# Altium PCB main.PcbDoc (part 2 of 8)
Units mil, origin at the board's own origin, x right, y up, seen from the top; angles counter-clockwise.
Board outline 3385.83 x 2362.2 mil, 8 copper layers (L1 (SIG), L2 (GND), L3 (SIG), L4 (GND), L5 (PWR), L6 (SIG), L7 (GND), L8 (SIG)), stack 46.958 mil thick; 318 components, 288 nets, 1482 pads, 1056 vias.
Unrouted connection lines stored in the file: 7.
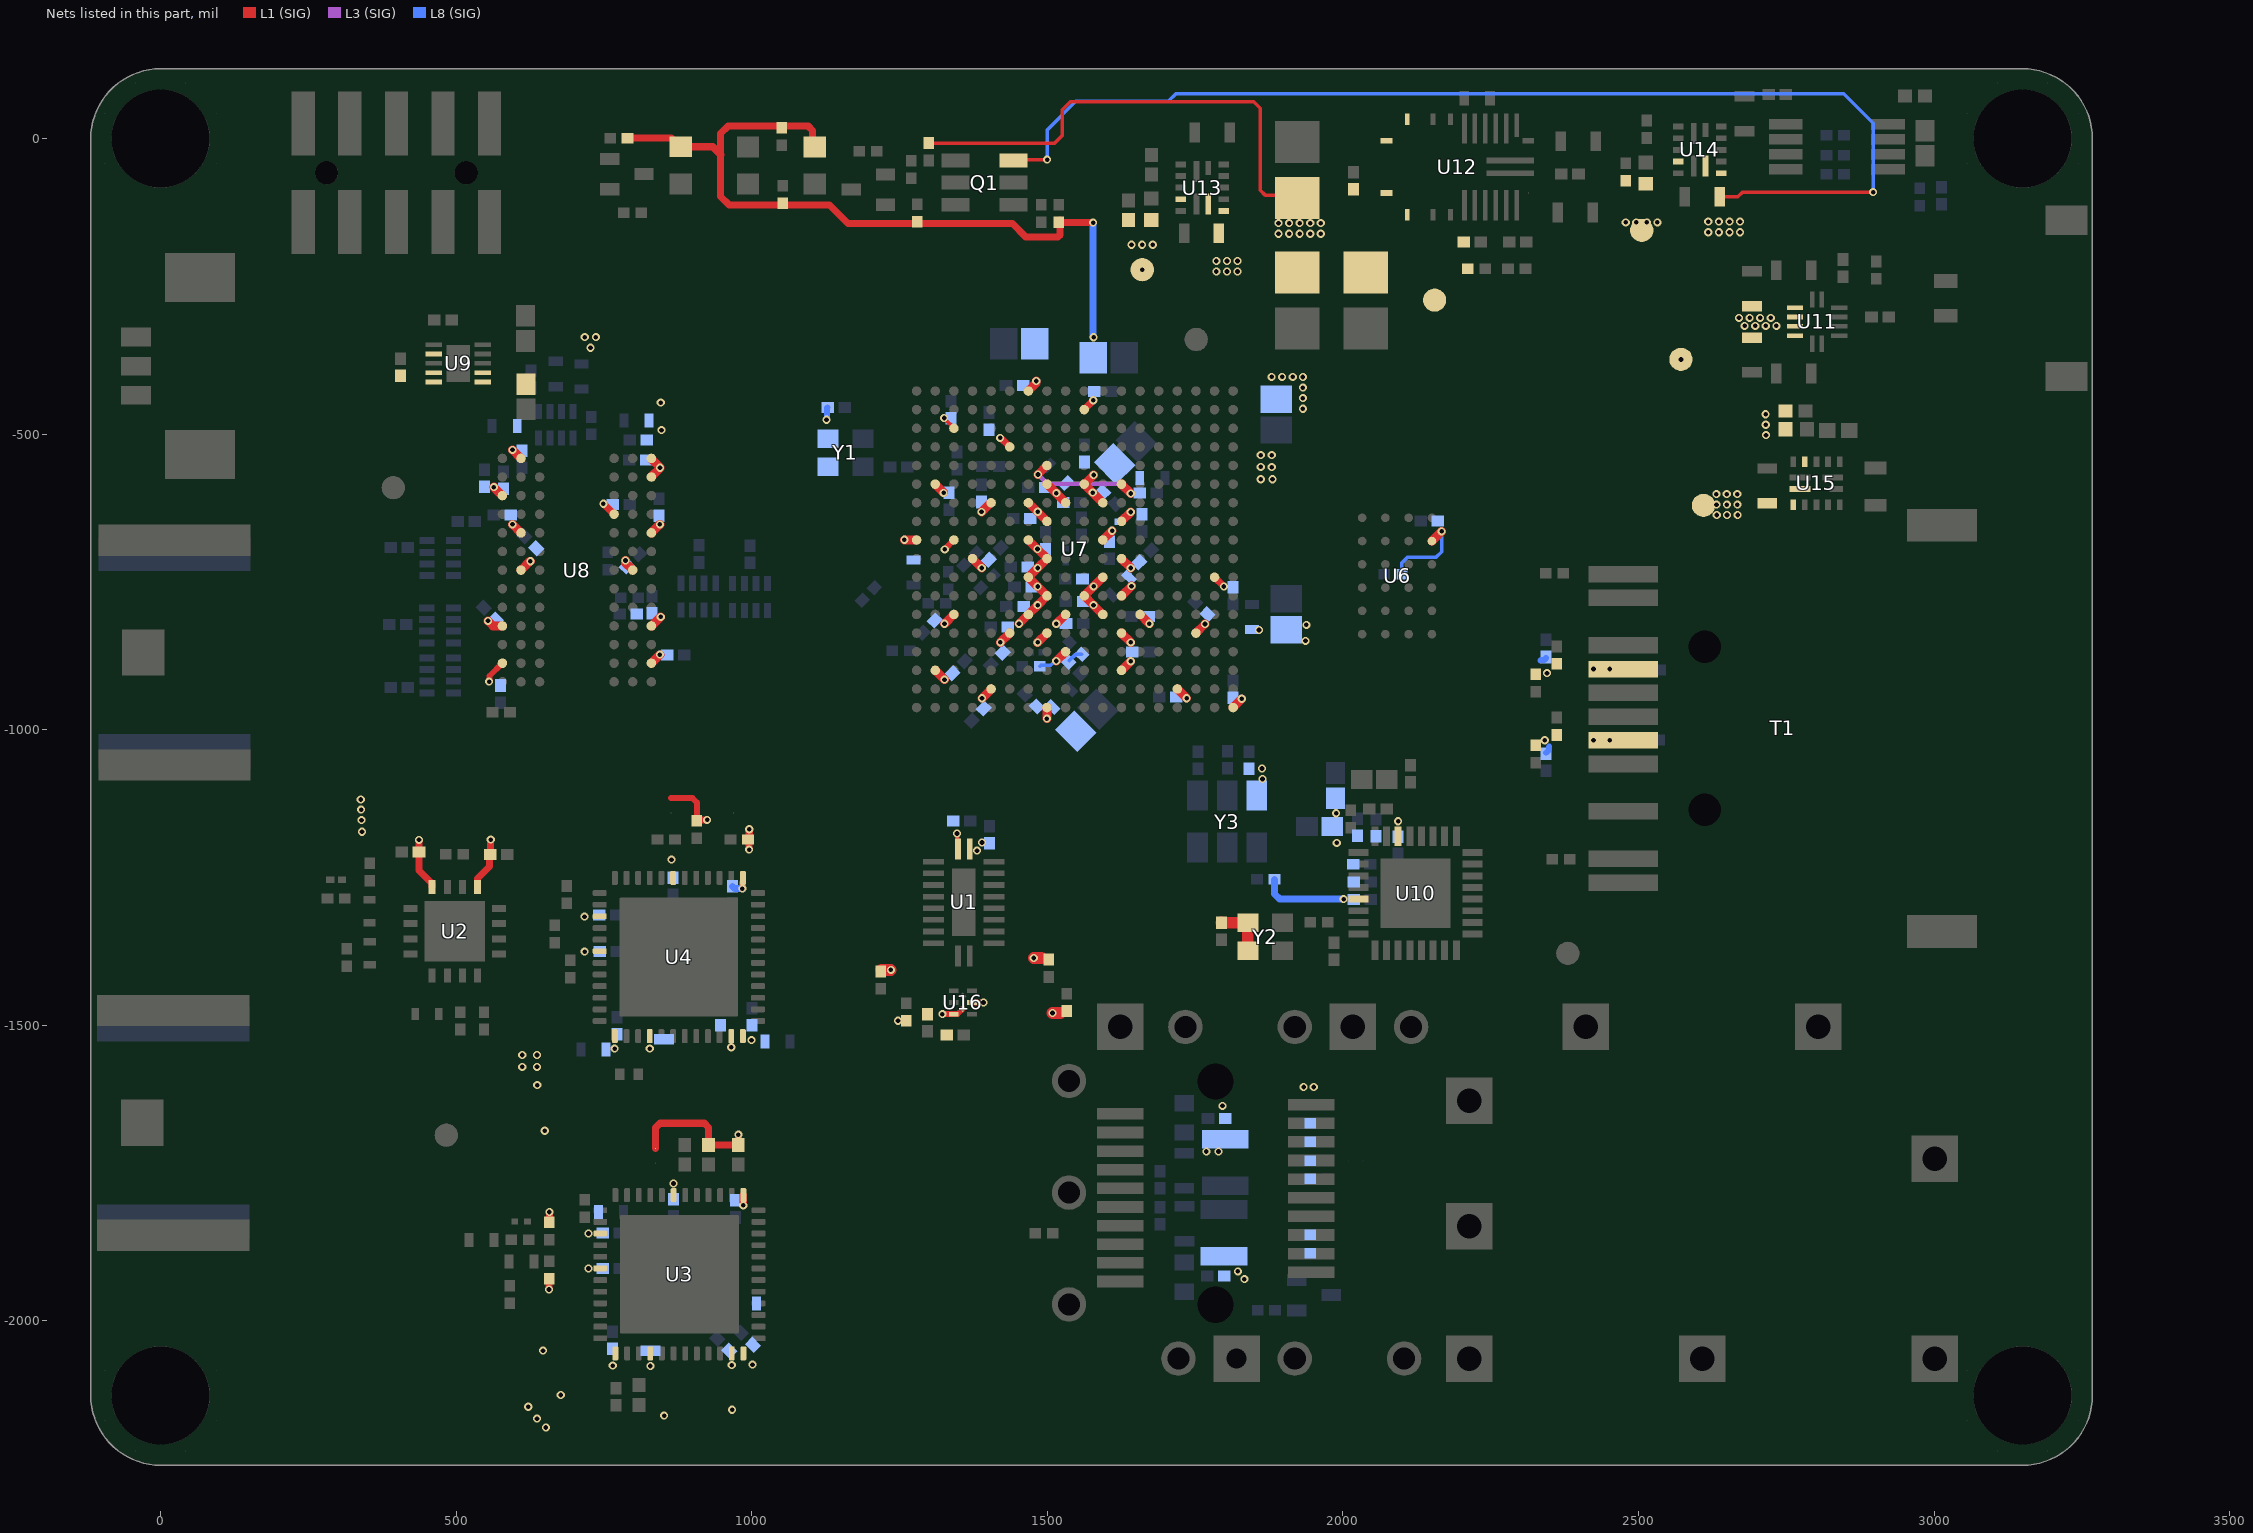
[diagram p8: the nets of this part, all layers, seen from the top]

## Footprints (in the part's own frame and the unit in brackets; to place one, negate y for a bottom-side part, rotate by r counter-clockwise, add the part's x,y. Pads: shape width x height; smd on the part's side, far side on the other; paste and mask are expansions set on the pad) (continued)
CAPC1005X55X10NL05 [mm] "Chip Capacitor, 2-Leads, Body 1.05x0.55mm, IPC Medium Density"
  rect 0.42x0.62 smd: 1(-0.55,0) 2(0.55,0)
  silkscreen extent -0.83,-0.48 0.83,0.48, body extent -0.53,-0.28 0.53,0.28, height 0.55
CAPC1608X100X20LL10 [mm] "Chip Capacitor, 2-Leads, Body 1.70x0.90mm, IPC High Density"
  rect 0.45x0.85 smd: 1(-0.75,0) 2(0.75,0)
  silkscreen extent -0.15,-0.33 0.15,0.33, body extent -0.85,-0.45 0.85,0.45, height 1
CAPC1608X100X20NL10 [mm] "Chip Capacitor, 2-Leads, Body 1.70x0.90mm, IPC Medium Density"
  rect 0.55x0.95 smd: 1(-0.8,0) 2(0.8,0)
  silkscreen extent -0.15,-0.38 0.15,0.38, body extent -0.85,-0.45 0.85,0.45, height 1
Fiducial [mm]
  round 1 smd paste+0 mask+0.5: 0(0,0)
  round 1 smd far side paste+0 mask+0.5: 0(0,0)
  L1 (SIG) pour cut-out: 0,-1 -0.383,-0.924 -0.707,-0.707 -0.924,-0.383 -1,0 -1,0 -0.924,0.383 -0.707,0.707 -0.383,0.924 0,1 0,1 0.383,0.924 0.707,0.707 0.924,0.383 1,0 1,0 0.924,-0.383 0.707,-0.707 0.383,-0.924 0,-1
  Keep-Out Layer circle w0.01: c0,0 r1
  Keep-Out Layer circle w0.01: c0,0 r1
FP-510CD-MFG [mm]
  rect 0.9x0.24 smd paste+0 mask+0: 1(-2.3,-0.25) 10(2.3,-0.25) 11(2.3,0.25) 20(-2.3,0.25)
  rect 0.24x0.9 smd paste+0 mask+0: 2(-1.75,-1.3) 3(-1.25,-1.3) 4(-0.75,-1.3) 5(-0.25,-1.3) 6(0.25,-1.3) 7(0.75,-1.3) 8(1.25,-1.3) 9(1.75,-1.3) 12(1.75,1.3) 13(1.25,1.3) 14(0.75,1.3) 15(0.25,1.3) 16(-0.25,1.3) 17(-0.75,1.3) 18(-1.25,1.3) 19(-1.75,1.3)
  rect 2.9x1 smd paste+0 mask+0: 21(0,0)
  silkscreen extent -3.45,-1.33 2.32,1.33, body extent -2.85,-1.85 2.85,1.85, height 0.25
FP-87832-1020-MFG [mm]
  rect 1x2.75 smd paste+0 mask+0: 1(-4,-2.125) 2(-4,2.125) 3(-2,-2.125) 4(-2,2.125) 5(0,-2.125) 6(0,2.125) 7(2,-2.125) 8(2,2.125) 9(4,-2.125) 10(4,2.125)
  round 1 hole 1 unplated paste-2539.97 mask+0: ""(-3,0) ""(3,0)
  silkscreen extent -6.43,-4.17 6.43,3.25, body extent -6.53,-3.6 6.53,3.6, height 0.25
FP-5040500291-MFG [mm]
  rect 0.6x1 smd paste+0 mask+0: 1(0.75,-3.04) 2(-0.75,-3.04)
  rect 1.25x1.8 smd paste-2539.97 mask+0: 3(-3.355,2.15) 4(3.355,2.15)
  silkscreen extent -3.47,-4.29 3.47,3.15, body extent -4.08,-3.64 4.08,3.25, height 0.25
FP-C1005-050-0_05-IPC_C [mil]
  rect 21.23x18.6 smd paste+0 mask+0: 1(-14.43,0) 2(14.43,0)
  silkscreen extent -25,-15 25,15, body extent -20,-10 20,10, height 22
FP-C1005-050-0_20-0_10-IPC_C [mil]
  rect 15.04x23.95 smd paste+0 mask+0: 1(-21.16,0) 2(21.16,0)
  silkscreen extent -29,-17 29,17, body extent -20,-10 20,10, height 22
FP-C1608-080-0_1-IPC_C [mil]
  rect 36.66x31.97 smd paste+0 mask+0: 1(-21.28,0) 2(21.28,0)
  silkscreen extent -40,-22 40,22, body extent -44,-22 44,22, height 10
FP-C2012-125-0_2-IPC_C [mil]
  rect 46.38x53.39 smd paste+0 mask+0: 1(-26.14,0) 2(26.14,0)
  silkscreen extent -49,-33 49,33, body extent -39,-25 39,25, height 57
FP-C3216-160-0_3-IPC_B [mil]
  rect 71.02x75.05 smd paste+0 mask+0: 1(-47.29,0) 2(47.29,0)
  silkscreen extent -83,-53 83,53, body extent -93,-47 93,47, height 10
FP-DFE252012C-MFG [mm]
  rect 0.8x2 smd paste+0 mask+0: 1(-1,0) 2(1,0)
  silkscreen extent -0.23,-1.1 0.23,1.1, body extent -1.25,-1 1.25,1, height 1.2
FP-DGK0008A-MFG [mm]
  rect 1.45x0.45 smd paste+0 mask+0: 1(-2.2,0.975) 2(-2.2,0.325) 3(-2.2,-0.325) 4(-2.2,-0.975) 5(2.2,-0.975) 6(2.2,-0.325) 7(2.2,0.325) 8(2.2,0.975)
  silkscreen extent -1.1,-1.55 1.1,1.55, body extent -3.03,-1.8 3.03,1.8, height 0.25
FP-GCM155-0_05-MFG [mm]
  rect 0.4x0.5 smd paste+0 mask+0: 1(-0.4,0) 2(0.4,0)
  silkscreen extent -0.53,-0.46 0.53,0.46, body extent -0.7,-0.38 0.7,0.38, height 0.25
FP-LQP03TG_02-IPC_C [mil]
  rect 13.94x10.34 smd paste+0 mask+0: 1(-10.01,0) 2(10.01,0)
  silkscreen extent -32,-12 17,12, body extent -21,-10 21,10, height 10
FP-LQP03TG_02-MFG [mm]
  rect 0.3x0.25 smd paste+0 mask+0: 1(-0.275,0) 2(0.275,0)
  silkscreen extent -0.83,-0.28 0.32,0.28, body extent -0.53,-0.27 0.53,0.27, height 0.25
FP-MPZ0603-IPC_C [mm]
  rect 0.263x0.263 smd paste+0 mask+0: 1(-0.3,0) 2(0.3,0)
  silkscreen extent -0.43,-0.3 0.43,0.3, body extent -0.3,-0.15 0.3,0.15, height 0.33
FP-PMEG2005AESFYL-MFG [mm]
  rect 0.2x0.28 smd paste-1000 mask-1000: 1(-0.2,0) 2(0.2,0)
  silkscreen extent -0.69,-0.25 0.31,0.25, body extent -0.3,-0.15 0.3,0.15, height 0.35
FP-SiT8008-7-MFG [mm]
  rect 0.9x0.8 smd paste+0 mask+0: 1(-0.75,-0.6) 2(0.75,-0.6) 3(0.75,0.6) 4(-0.75,0.6)
  silkscreen extent -1.87,-1.41 1.02,1.43, body extent -1,-0.8 1,0.8, height 0.85
FP-UMT3F-MFG [mm]
  rect 0.83x0.52 smd paste+0 mask+0: 1(-0.735,0.65) 2(-0.735,-0.65) 3(0.735,0)
  silkscreen extent -0.67,-1.05 0.67,1.05, body extent -1.25,-1.15 1.25,1.15, height 0.25
JS6_MFG [mm] "Recommended Land Pattern"
  rect 1.29x0.89 smd paste+0 mask+0: 1(-1.125,1.27) 2(-1.125,0) 3(-1.125,-1.27) 4(1.125,-1.27) 5(1.125,0) 6(1.125,1.27)
  silkscreen extent -2.4,-2.64 1.74,2.64, body extent -1.6,-2.5 1.6,2.5, height 1.2
LEDC1608X55N [mm]
  rect 0.9x0.95 smd: 1(-0.8,0) 2(0.8,0)
  silkscreen extent -1.6,-0.82 0.8,0.82, body extent -0.83,-0.4 0.77,0.4, height 0.55
MOLX-53398-0371_V [mm] "SMD, 3-Leads, Body 8.9x3.7mm, Pitch 1.25mm"
  rect 0.8x1.3 smd: 1(-1.25,2) 2(0,2) 3(1.25,2)
  rect 2.1x3 smd: MP1(-3.8,-0.75) MP2(3.8,-0.75)
  silkscreen extent -4.45,-1.85 4.45,3.32, body extent -4.45,-1.85 4.45,2.35, height 4.7
MP5077GGZ [mm]
  rect 0.7x0.2 smd: 1(-0.95,0.6) 2(-0.95,0.2) 3(-0.95,-0.2) 4(-0.95,-0.6) 7(0.95,-0.6) 8(0.95,-0.2) 9(0.95,0.2) 10(0.95,0.6)
  rect 0.2x0.7 smd: 5(-0.2,-0.95) 6(0.2,-0.95) 11(0.2,0.95) 12(-0.2,0.95)
  silkscreen extent -1.8,0.55 -1.7,0.65, body extent -1,-1 1,1, height 1.1
MPM3650CGQWZ [mm]
  rect 1.016x0.2 smd: 1(-1.792,2.55)
  rect 1.3x0.2 smd: 2(-1.65,2.1) 3(-1.65,1.65) 4(-1.65,1.2) 5(-1.65,0.75) 6(-1.65,0.3) 15(1.65,0.3) 16(1.65,0.75) 17(1.65,1.2) 18(1.65,1.65) 19(1.65,2.1) 20(1.65,2.55)
  rect 0.5x0.2 smd: 7(-2.05,-0.3) 8(-2.05,-1.05) 9(-2.05,-2.15) 12(2.05,-2.15) 13(2.05,-1.05) 14(2.05,-0.3)
  rect 0.25x0.5 smd: 10(-1.125,-3.05) 11(1.125,-3.05) 24(-1.125,3.05)
  round 0.025 smd: 21(1.125,3.05)
  rect 0.25x2.05 smd: 22(0.275,2.275) 23(-0.275,2.275)
  L1 (SIG) region: -1,3.3 -1.25,3.3 -1.25,2.8 -1.8,2.8 -1.8,2.65 -2.3,2.65 -2.3,2.45 -1.223,2.45 -1.223,2.452 -1,2.675 -1,2.875
  L1 (SIG) region: -2.3,-2.05 -2.3,-2.25 -1.8,-2.25 -1.8,-2.8 -1.25,-2.8 -1.25,-3.3 -1,-3.3 -1,-2.8 1,-2.8 1,-3.3 1.25,-3.3 1.25,-2.8 1.8,-2.8 1.8,-2.25 2.3,-2.25 2.3,-2.05
  L1 (SIG) region: -2.3,-0.2 -2.3,-0.4 -1.8,-0.4 -1.8,-0.95 -2.3,-0.95 -2.3,-1.15 2.3,-1.15 2.3,-0.95 1.8,-0.95 1.8,-0.4 2.3,-0.4 2.3,-0.2
  L1 (SIG) region: 1.25,3.3 1,3.3 1,2.45 2.3,2.45 2.3,2.65 1.896,2.65 1.8,2.65 1.8,2.8 1.25,2.8
  L1 (SIG) region: 1,2.8 1.25,2.8 1.25,3.3 1,3.3
  silkscreen extent -2.8,2.5 -2.7,2.6, body extent -2,-3 2,3, height 1.75
MPM3834CGPAP [mm]
  rect 0.6x0.25 smd: 1(-0.85,0.25)
  rect 0.9x0.25 smd: 2(-0.7,-0.25) 8(0.7,-0.25) 9(0.7,0.25)
  rect 0.25x0.45 smd: 3(-1,-0.925) 4(-0.5,-0.925) 5(0,-0.925) 6(0.5,-0.925) 7(1,-0.925) 10(1,0.925) 11(0.5,0.925) 12(0,0.925) 13(-0.5,0.925) 14(-1,0.925)
  silkscreen extent -1.8,0.2 -1.7,0.3, body extent -1.25,-1.25 1.25,1.25, height 1.21
QFN50P500X500X100-33N-D [mm]
  rect 0.85x0.3 smd: 1(-2.45,1.75) 2(-2.45,1.25) 3(-2.45,0.75) 4(-2.45,0.25) 5(-2.45,-0.25) 6(-2.45,-0.75) 7(-2.45,-1.25) 8(-2.45,-1.75) 17(2.45,-1.75) 18(2.45,-1.25) 19(2.45,-0.75) 20(2.45,-0.25) 21(2.45,0.25) 22(2.45,0.75) 23(2.45,1.25) 24(2.45,1.75)
  rect 0.3x0.85 smd: 9(-1.75,-2.45) 10(-1.25,-2.45) 11(-0.75,-2.45) 12(-0.25,-2.45) 13(0.25,-2.45) 14(0.75,-2.45) 15(1.25,-2.45) 16(1.75,-2.45) 25(1.75,2.45) 26(1.25,2.45) 27(0.75,2.45) 28(0.25,2.45) 29(-0.25,2.45) 30(-0.75,2.45) 31(-1.25,2.45) 32(-1.75,2.45)
  rect 3x3 smd: 33(0,0)
  silkscreen extent -3,2.38 -2.75,2.62, body extent -2.5,-2.5 2.5,2.5, height 1
QFN_2016_4pins [mm]
  rect 0.9x0.8 smd: 1(-0.75,-0.6) 2(0.75,-0.6) 3(0.75,0.6) 4(-0.75,0.6)
  silkscreen extent -0.85,-1.5 -0.65,-1.3, body extent -1,-0.81 1,0.79, height 0.8
RESC1005X40X25LL05T10 [mm] "Chip Resistor, 2-Leads, Body 1.00x0.50mm, IPC High Density"
  rect 0.5x0.45 smd: 1(-0.375,0) 2(0.375,0)
  body extent -0.53,-0.27 0.53,0.28, height 0.4
RESC1005X40X25ML05T10 [mm] "Chip Resistor, 2-Leads, Body 1.00x0.50mm, IPC Low Density"
  rect 0.7x0.65 smd: 1(-0.475,0) 2(0.475,0)
  body extent -0.53,-0.27 0.53,0.28, height 0.4
RESC1005X40X25NL05T10 [mm] "Chip Resistor, 2-Leads, Body 1.00x0.50mm, IPC Medium Density"
  rect 0.6x0.55 smd: 1(-0.425,0) 2(0.425,0)
  body extent -0.53,-0.27 0.53,0.28, height 0.4
RESC1608X55X30LL15T15 [mm] "Chip Resistor, 2-Leads, Body 1.60x0.80mm, IPC High Density"
  rect 0.7x0.85 smd: 1(-0.625,0) 2(0.625,0)
  body extent -0.87,-0.48 0.87,0.48, height 0.55
RHS0048A_V [mm] "QFN, 48-Leads, Body 7x7mm, Pitch 0.5mm, TI Recommended"
  rrect40% 0.6x0.25 smd: 1(-3.4,2.75) 2(-3.4,2.25) 3(-3.4,1.75) 4(-3.4,1.25) 5(-3.4,0.75) 6(-3.4,0.25) 7(-3.4,-0.25) 8(-3.4,-0.75) 9(-3.4,-1.25) 10(-3.4,-1.75) 11(-3.4,-2.25) 12(-3.4,-2.75) 25(3.4,-2.75) 26(3.4,-2.25) 27(3.4,-1.75) 28(3.4,-1.25) 29(3.4,-0.75) 30(3.4,-0.25) 31(3.4,0.25) 32(3.4,0.75) 33(3.4,1.25) 34(3.4,1.75) 35(3.4,2.25) 36(3.4,2.75)
  rrect40% 0.25x0.6 smd: 13(-2.75,-3.4) 14(-2.25,-3.4) 15(-1.75,-3.4) 16(-1.25,-3.4) 17(-0.75,-3.4) 18(-0.25,-3.4) 19(0.25,-3.4) 20(0.75,-3.4) 21(1.25,-3.4) 22(1.75,-3.4) 23(2.25,-3.4) 24(2.75,-3.4) 37(2.75,3.4) 38(2.25,3.4) 39(1.75,3.4) 40(1.25,3.4) 41(0.75,3.4) 42(0.25,3.4) 43(-0.25,3.4) 44(-0.75,3.4) 45(-1.25,3.4) 46(-1.75,3.4) 47(-2.25,3.4) 48(-2.75,3.4)
  rrect10% 1.05x1.05 on Top Paste: 49(-1.875,1.875) 49(-1.875,-0.625) 49(-1.875,0.625) 49(-1.875,-1.875) 49(-0.625,1.875) 49(-0.625,0.625) 49(-0.625,-0.625) 49(-0.625,-1.875) 49(0.625,1.875) 49(0.625,0.625) 49(0.625,-0.625) 49(0.625,-1.875) 49(1.875,1.875) 49(1.875,-0.625) 49(1.875,0.625) 49(1.875,-1.875)
  rrect2% 5.1x5.1 smd paste-2.55: 49(0,0)
  silkscreen extent -3.7,-3.7 3.7,3.7, body extent -3.57,-3.57 3.57,3.57, height 0.81
SAMTEC_BNC7T-J-P-XX-ST-EM1D [mm]
  rect 1.98x1.83 smd: 1(0,2.185)
  rect 1.35x6.55 smd: S1(-4.825,3.525) S2(4.825,3.525)
  rect 1.5x6.55 smd far side: S3(-4.25,3.525) S4(4.25,3.525)
  silkscreen extent -3.8,6.35 3.8,6.35, body extent -7.99,-19.13 7.99,6.35, height 8.63
SMTSO-2540CTJ [mil] "M2.5 L:40mm BRASS SMT surface mount nut post"
  round 1 smd: 1(-94.12,-42.21) 1(-94.12,42.21) 1(-42.21,-94.12) 1(-42.21,94.12) 1(42.21,-94.12) 1(42.21,94.12) 1(94.12,-42.21) 1(94.12,42.21)
  round 166.14 hole 166.14 paste+0 mask+4: 1(0,0)
  L1 (SIG) region: -47.65,-68.05 -31.79,-76.75 -14.43,-81.81 -14.43,-81.81 -21.19,-120.19 -46.71,-112.76 -70,-99.98 -70,-99.98
  L1 (SIG) region: 14.43,-81.81 31.79,-76.75 47.65,-68.05 47.65,-68.05 70,-99.98 46.71,-112.76 21.19,-120.19 21.19,-120.19
  L1 (SIG) region: 68.05,-47.65 76.75,-31.79 81.81,-14.43 81.81,-14.43 120.19,-21.19 112.76,-46.71 99.98,-70 99.98,-70
  L1 (SIG) region: 81.81,14.43 76.75,31.79 68.05,47.65 68.05,47.65 99.98,70 112.76,46.71 120.19,21.19 120.19,21.19
  L1 (SIG) region: 47.65,68.05 31.79,76.75 14.43,81.81 14.43,81.81 21.19,120.19 46.71,112.76 70,99.98 70,99.98
  L1 (SIG) region: -14.43,81.81 -31.79,76.75 -47.65,68.05 -47.65,68.05 -70,99.98 -46.71,112.76 -21.19,120.19 -21.19,120.19
  L1 (SIG) region: -68.05,47.65 -76.75,31.79 -81.81,14.43 -81.81,14.43 -120.19,21.19 -112.76,46.71 -99.98,70 -99.98,70
  L1 (SIG) region: -81.81,-14.43 -76.75,-31.79 -68.05,-47.65 -68.05,-47.65 -99.98,-70 -112.76,-46.71 -120.19,-21.19 -120.19,-21.19
  body extent -109,-109 109,109, height 157
Solderbridge [mil]
  round 1 smd: 1(-12.44,0) 2(12.44,0)
  L1 (SIG) region: 3.14,-17.94 3.28,-18.65 3.69,-19.26 4.29,-19.66 5,-19.8 5,-19.8 5,-19.8 13.57,-16.17 19.59,-9.06 21.75,0 19.59,9.06 13.57,16.17 4.99,19.8 4.99,19.8 5,19.8 4.29,19.66 3.69,19.26 3.28,18.65 3.14,17.94 3.14,17.94
  L1 (SIG) region: -3.14,17.94 -3.28,18.65 -3.68,19.26 -4.29,19.66 -5,19.8 -5,19.8 -4.99,19.8 -13.57,16.17 -19.59,9.06 -21.74,0 -19.58,-9.06 -13.56,-16.17 -4.98,-19.8 -4.98,-19.8 -5,-19.8 -4.29,-19.66 -3.68,-19.26 -3.28,-18.65 -3.14,-17.94 -3.14,-17.94
SON40P200X200X80-11N [mm]
  rect 0.7x0.2 smd: 1(-1.05,0.8) 2(-1.05,0.4) 3(-1.05,0) 4(-1.05,-0.4) 5(-1.05,-0.8) 6(1.05,-0.8) 7(1.05,-0.4) 8(1.05,0) 9(1.05,0.4) 10(1.05,0.8)
  rect 1x1.6 smd: 11(0,0)
  silkscreen extent -1.62,1.04 -1.42,1.24, body extent -1,-1 1,1, height 0.8
SOT95P280X145-6N [mm]
  rect 1.2x0.6 smd: 1(-1.25,0.95) 2(-1.25,0) 3(-1.25,-0.95) 4(1.25,-0.95) 5(1.25,0) 6(1.25,0.95)
  silkscreen extent -0.3,-1.45 0.3,1.45, body extent -1.4,-1.45 1.4,1.45, height 1.2
SQB16A [mm] "QFN, 16-Leads, Body 4x4mm, Pitch 0.65mm, Thermal Pad 2.6x2.6mm, NSC Recommended"
  rect 0.6x0.3 smd paste-0.15 mask+0.051: 1(-1.9,0.975) 2(-1.9,0.325) 3(-1.9,-0.325) 4(-1.9,-0.975) 9(1.9,-0.975) 10(1.9,-0.325) 11(1.9,0.325) 12(1.9,0.975)
  rect 0.3x0.6 smd paste-0.15 mask+0.051: 5(-0.975,-1.9) 6(-0.325,-1.9) 7(0.325,-1.9) 8(0.975,-1.9) 13(0.975,1.9) 14(0.325,1.9) 15(-0.325,1.9) 16(-0.975,1.9)
  rect 2.6x2.6 smd paste-1.3 mask+0.051: 17(0,0)
  silkscreen extent -2.92,-2.25 2.25,2.25, body extent -2.05,-2.05 2.05,2.05, height 0.8
TC124FR0739RL [mm]
  rect 0.3x0.65 smd: 1(-0.75,-0.575) 2(-0.25,-0.575) 3(0.25,-0.575) 4(0.75,-0.575) 5(0.75,0.575) 6(0.25,0.575) 7(-0.25,0.575) 8(-0.75,0.575)
  silkscreen extent -1,-0.1 1,0.1, body extent -1,-0.87 1,0.87, height 0.6
TCA39306DTMR [mm]
  rect 0.42x0.2 smd: 1(-0.39,0.5) 2(-0.39,0) 3(-0.39,-0.5) 5(0.39,-0.5) 6(0.39,0) 7(0.39,0.5)
  rect 0.22x0.22 smd rot 135: 4(0,-0.27) 8(0,0.27)
  silkscreen extent -1.2,0.45 -1.1,0.55, body extent -0.4,-0.67 0.4,0.67, height 0.5
TP_SMD_Ø1.0mm [mm]
  round 1 smd paste-5: 1(0,0)
  silkscreen extent -0.76,-0.76 0.76,0.76

## Part data
C1 C2 C3 C4 C6 C7 C11 C12 C13 C14 C138 C152 C153 C156 C159 C160: "MLCC 22 uF, ±20%, 6.3 V, -55 to 85 degC, 1608 (0603 Metric), RoHS, Tape and Reel", Manufacturer=TDK, Operating Temperature=-55degC~85degC, Package / Case=0603(1608Metric), Package Description="2-Pin Surface Mount Device, Body 1.6 x 0.8 mm", Package Reference=603, PCN Part Number=MLCCPartNumberChange30/Nov/2012, Ratings=-, Standard Package=1, Temperature Coefficient=X5R, Tolerance=±20%, Voltage - Rated=6.3V, Applications=GeneralPurpose, Category=Capacitors, Datasheet URL=http://www.farnell.com/datasheets/1913358.pdf, Datasheet Version=Mar-15, Design Resources=20WNon-IsolatedBuckLEDDriverUsingPLLNK460KG, Family=CeramicCapacitors, Features=-, Height - Seated (Max)=-, Kits=445-9003-KIT-ND-KITCAPCERHICAPMLCCSMD, Lead Spacing=-, Lead Style=-, Manufacturer URL=http://www.tdk.com/, Mounting Type=SurfaceMount,MLCC, Online Catalog=CSeries,GeneralPurpose, Other Names=445-8028-1, Packaging=CutTape(CT), Product Training Modules=CSeriesGeneralApplicationsSEAT,CCV,andTVCLDesignToolsGuidetoReplacinganElectrolyticCapacitorwithanMLCC, RoHS Information=RoHSCertificate-MLCC, Series=C, Size / Dimension="0.063\"Lx0.031\"W(1.60mmx0.80mm)", Thickness (Max)="0.039\"(1.00mm)"
C5 C17 C161: "Capacitor", Manufacturer_Name=TDK, Datasheet Link=http://docs-europe.electrocomponents.com/webdocs/14e9/0900766b814e9125.pdf, Height=0.55mm, Part Number=CGA2B2C0G1H3R3C050BA
C8 C10 C15 C31 C36 C38 C46 C49 C50 C52 C53 C55 C56 C59 C60 C61 C62 C63 C100 C102 C110 C128 C130 C131 C132 C134 C135 C136 C137 C149 C150 C151 C154 C155 C157: "MLCC 100nF ±10% 50V X7R SMD 0402", Case Code (Imperial)=0402, Case Code (Metric)=1005, Dielectric=X7R, Dielectric Material=Ceramic, Max Operating Temperature=125°C, Min Operating Temperature=-55°C, Package Quantity=1, Tolerance=10%, Voltage=50V, Case/Package=0402, Construction=Flat, Depth=0.5mm, Height=0.5mm, Lead Free="Lead Free", Length=1mm, Mount="Surface Mount", Packaging="Tape and Reel", Part Number=C1005X7R1H104K050BB, Radiation Hardening=No, REACH SVHC="No SVHC", Resistor Type=Ceramic, RoHS Compliant=Yes, Series=C, Termination=SMD/SMT, Thickness=0.022inch, Voltage Rating=50V, Voltage Rating (DC)=50V, Weight=2.3E-05oz, Width=0.02inch
C9 C20 C146: "MLCC 10nF ±10% 100V X7S SMD 0402", Case Code (Imperial)=0402, Case Code (Metric)=1005, Dielectric=X7S, Dielectric Material=Ceramic, Max Operating Temperature=125°C, Min Operating Temperature=-55°C, Package Quantity=1, Tolerance=10%, Voltage=100V, Case/Package=0402, Depth=0.5mm, Dissipation Factor=5%, Height=0.5mm, Lead Free="Lead Free", Length=1mm, Mount="Surface Mount", Number of Pins=2, Packaging="Tape and Reel", Part Number=C1005X7S2A103K050BB, REACH SVHC="No SVHC", Resistor Type=Ceramic, RoHS Compliant=Yes, Series=C, Termination=SMD/SMT, Thickness=0.022inch, Voltage Rating=100V, Voltage Rating (DC)=100V, Weight=2.3E-05oz, Width=0.02inch
C16 C21 C22: "MLCC 100uF ±20% 4V X5R SMD 1206", Case Code (Imperial)=1206, Case Code (Metric)=3216, Dielectric=X5R, Dielectric Material=Ceramic, Max Operating Temperature=85°C, Min Operating Temperature=-55°C, Package Quantity=2000, Tolerance=20%, Voltage Rating=4V, Case/Package=1206, Construction=Flat, Depth=1.6mm, Height=1.6mm, Lead Free="Lead Free", Length=3.2mm, Mount="Surface Mount", Packaging="Tape and Reel", Part Number=C3216X5R0G107M160AB, Radiation Hardening=No, Resistor Type=Ceramic, RoHS Compliant=Yes, Series=C, Termination=SMD/SMT, Thickness=0.071inch, Voltage Rating (DC)=4V, Weight=0.000571oz, Width=0.063inch
C18: "MLCC 39pF ±5% 50V C0G SMD 0402", Case Code (Imperial)=0402, Case Code (Metric)=1005, Dielectric=C0G, Dielectric Material=Ceramic, Max Operating Temperature=125°C, Min Operating Temperature=-55°C, Package Quantity=1, Tolerance=5%, Voltage Rating=50V, Case/Package=0402, Construction=Flat, Depth=0.5mm, Height=0.5mm, Lead Free="Lead Free", Length=1mm, Mount="Surface Mount", Packaging="Tape and Reel", Part Number=C1005C0G1H390J050BA, Radiation Hardening=No, RoHS Compliant=Yes, Series=C, Termination=SMD/SMT, Thickness=0.022inch, Voltage Rating (DC)=50V, Weight=2.3E-05oz, Width=0.02inch
C19 C129 C139 C141: "MLCC 1 uF, +/- 10%, 10 V, -55 to 85 degC, 0402 (1005 Metric), RoHS, Tape and Reel", Manufacturer=TDK, Operating Temperature=-55°C~85°C, Package / Case=0402(1005Metric), Package Description="2-Pin Surface Mount Device, Body 1 x 0.5 mm", Package Reference=1005, PCN Part Number=MLCCPartNumberChange30/Nov/2012, Ratings=-, Standard Package=1, Temperature Coefficient=X5R, Tolerance=±10%, Voltage - Rated=10V, Applications=GeneralPurpose, Category=Capacitors, Datasheet URL=http://download.siliconexpert.com/pdfs/2015/4/21/15/54/45/779/tdk_/manual/37024850441143360mlcc_commercial_general_en.pdf, Datasheet Version=03/2015, Family=CeramicCapacitors, Features=-, Height - Seated (Max)=-, Lead Spacing=-, Lead Style=-, Manufacturer URL=http://www.tdk.com/, Mounting Technology=SurfaceMount, Mounting Type=SurfaceMount,MLCC, Online Catalog=CSeries,GeneralPurpose, Other Names=445-4114-6, Packaging=Digi-Reel®, Part Number=C1005X5R1A105K050BB, Product Training Modules=CSeriesGeneralApplicationsSEAT,CCV,andTVCLDesignToolsGuidetoReplacinganElectrolyticCapacitorwithanMLCC, RoHS Information=RoHSCertificate-MLCC, Series=C, Size / Dimension="0.039\"Lx0.020\"W(1.00mmx0.50mm)", Thickness (Max)="0.022\"(0.55mm)"
C23 C24 C133: "MLCC 10μF ±10% 6.3V JB SMD 0603", Case Code (Imperial)=0603, Case Code (Metric)=1608, Dielectric Material=Ceramic, Max Operating Temperature=85°C, Min Operating Temperature=-25°C, Package Quantity=4000, Tolerance=10%, Voltage Rating=6.3V, Case/Package=0603, Height=0.8mm, Lead Free="Lead Free", Length=0.063inch, Mount="Surface Mount", Packaging="Tape and Reel", Resistor Type=Ceramic, RoHS Compliant=Yes, Series=C, Termination=SMD/SMT, Thickness=0.035inch, Voltage Rating (DC)=6.3V, Width=0.8mm
C25 C26 C106 C107 C108 C109 C126 C127: "MLCC 470nF ±10% 25V X5R SMD 0402", Case Code (Imperial)=0402, Case Code (Metric)=1005, Dielectric=X5R, Dielectric Material=Ceramic, Max Operating Temperature=85°C, Min Operating Temperature=-55°C, Package Quantity=10000, Tolerance=10%, Voltage=25V, Case/Package=0402, Construction=Flat, Depth=0.5mm, Dissipation Factor=10%, Height=0.5mm, Lead Free="Lead Free", Length=1mm, Mount="Surface Mount", Packaging="Tape and Reel", Part Number=C1005X5R1E474K050BB, Radiation Hardening=No, REACH SVHC="No SVHC", Resistor Type=Ceramic, RoHS Compliant=Yes, Series=C, Termination=SMD/SMT, Thickness=500um, Voltage Rating=25V, Voltage Rating (DC)=25V, Weight=2.3E-05oz, Width=0.02inch
C27 C29 C40 C54 C86 C87 C90 C111 C112 C114 C115 C116 C117 C118 C120 C121 C122 C123 C124 C162: library part CMP-2000-06003-2, "Multilayer Ceramic Capacitors 470nF ±10% 25V X5R SMD 0402", Case Code (Imperial)=0402, Case Code (Metric)=1005, Dielectric=X5R, Dielectric Material=Ceramic, Max Operating Temperature=85°C, Min Operating Temperature=-55°C, Package Quantity=10000, Tolerance=10%, Voltage=25V, Case/Package=0402, Construction=Flat, Depth=0.5mm, Dissipation Factor=10%, Height=0.5mm, Lead Free="Lead Free", Length=1mm, Mount="Surface Mount", Packaging="Tape and Reel", Part Number=C1005X5R1E474K050BB, Radiation Hardening=No, REACH SVHC="No SVHC", Resistor Type=Ceramic, RoHS Compliant=Yes, Series=C, Termination=SMD/SMT, Thickness=500um, Voltage Rating=25V, Voltage Rating (DC)=25V, Weight=2.3E-05oz, Width=0.02inch
C28 C89: "Multilayer Ceramic Capacitors 33pF ±5% 50V NP0 SMD 0402", Case Code (Imperial)=0402, Case Code (Metric)=1005, Dielectric=C0G, Max Operating Temperature=150°C, Min Operating Temperature=-55°C, Package Quantity=10000, Tolerance=5%, Voltage Rating=50V, Case/Package=0402, Features="High Temperature", Height=0.5mm, Length=0.039inch, Mount="Surface Mount", Packaging="Tape and Reel", Part Number=C1005NP01H330J050BA, RoHS Compliant=Yes, Series=C, Termination=SMD/SMT, Thickness=0.022inch, Voltage Rating (DC)=50V, Weight=2.3E-05oz, Width=0.02inch
C30 C78 C79 C80 C81 C83 C84 C91 C92 C95 C96 C97 C98 C174 C176 C194: "Multilayer Ceramic Capacitors 470nF ±10% 25V X5R SMD 0402", Case Code (Imperial)=0402, Case Code (Metric)=1005, Dielectric=X5R, Dielectric Material=Ceramic, Max Operating Temperature=85°C, Min Operating Temperature=-55°C, Package Quantity=10000, Tolerance=10%, Voltage=25V, Case/Package=0402, Construction=Flat, Depth=0.5mm, Dissipation Factor=10%, Height=0.5mm, Lead Free="Lead Free", Length=1mm, Mount="Surface Mount", Packaging="Tape and Reel", Part Number=C1005X5R1E474K050BB, Radiation Hardening=No, REACH SVHC="No SVHC", Resistor Type=Ceramic, RoHS Compliant=Yes, Series=C, Termination=SMD/SMT, Thickness=500um, Voltage Rating=25V, Voltage Rating (DC)=25V, Weight=2.3E-05oz, Width=0.02inch
C32: "MLCC 100pF ±5% 50V C0G SMD 0402", Case Code (Imperial)=0402, Case Code (Metric)=1005, Dielectric=C0G, Dielectric Material=Ceramic, Max Operating Temperature=125°C, Min Operating Temperature=-55°C, Package Quantity=1, Temperature Coefficient=30ppm/°C, Tolerance=5%, Voltage=50V, Case/Package=0402, Construction=Flat, Depth=0.5mm, Height=0.5mm, Lead Free="Lead Free", Length=1mm, Mount="Surface Mount", Number of Pins=2, Packaging="Tape and Reel", Part Number=C1005C0G1H101J050BA, Radiation Hardening=No, REACH SVHC="No SVHC", RoHS Compliant=Yes, Series=C, Termination=SMD/SMT, Thickness=0.022inch, Voltage Rating=50V, Voltage Rating (DC)=50V, Weight=2.3E-05oz, Width=0.5mm
C33 C34 C35 C165 C166 C167 C168 C171 C172: library part CMP-2000-05393-2, "Multilayer Ceramic Capacitors 100nF ±10% 50V X7R SMD 0402", Case Code (Imperial)=0402, Case Code (Metric)=1005, Dielectric=X7R, Dielectric Material=Ceramic, Max Operating Temperature=125°C, Min Operating Temperature=-55°C, Package Quantity=1, Tolerance=10%, Voltage=50V, Case/Package=0402, Construction=Flat, Depth=0.5mm, Height=0.5mm, Lead Free="Lead Free", Length=1mm, Mount="Surface Mount", Packaging="Tape and Reel", Part Number=C1005X7R1H104K050BB, Radiation Hardening=No, REACH SVHC="No SVHC", Resistor Type=Ceramic, RoHS Compliant=Yes, Series=C, Termination=SMD/SMT, Thickness=0.022inch, Voltage Rating=50V, Voltage Rating (DC)=50V, Weight=2.3E-05oz, Width=0.02inch
C37 C39 C41: library part CMP-08246-004001-1, "Multilayer Ceramic Capacitors 10μF ±10% 6.3V JB SMD 0603", Case Code (Imperial)=0603, Case Code (Metric)=1608, Dielectric Material=Ceramic, Max Operating Temperature=85°C, Min Operating Temperature=-25°C, Package Quantity=4000, Tolerance=10%, Voltage Rating=6.3V, Case/Package=0603, Height=0.8mm, Lead Free="Lead Free", Length=0.063inch, Mount="Surface Mount", Packaging="Tape and Reel", Resistor Type=Ceramic, RoHS Compliant=Yes, Series=C, Termination=SMD/SMT, Thickness=0.035inch, Voltage Rating (DC)=6.3V, Width=0.8mm
C42 C45: library part CMP-08246-005668-1, "Multilayer Ceramic Capacitors 10nF ±10% 100V X7S SMD 0402", Case Code (Imperial)=0402, Case Code (Metric)=1005, Dielectric=X7S, Dielectric Material=Ceramic, Max Operating Temperature=125°C, Min Operating Temperature=-55°C, Package Quantity=1, Tolerance=10%, Voltage=100V, Case/Package=0402, Depth=0.5mm, Dissipation Factor=5%, Height=0.5mm, Lead Free="Lead Free", Length=1mm, Mount="Surface Mount", Number of Pins=2, Packaging="Tape and Reel", REACH SVHC="No SVHC", Resistor Type=Ceramic, RoHS Compliant=Yes, Series=C, Termination=SMD/SMT, Thickness=0.022inch, Voltage Rating=100V, Voltage Rating (DC)=100V, Weight=2.3E-05oz, Width=0.02inch
C43 C47: library part CMP-08246-005584-1, "Multilayer Ceramic Capacitors 1nF ±5% 100V C0G SMD 0402", Case Code (Imperial)=0402, Case Code (Metric)=1005, Dielectric=C0G, Max Operating Temperature=125°C, Min Operating Temperature=-55°C, Package Quantity=10000, Tolerance=5%, Voltage Rating=100V, Case/Package=0402, Height=0.5mm, Length=0.039inch, Mount="Surface Mount", Packaging="Tape and Reel", Part Number=C1005C0G2A102J050BC, RoHS Compliant=Yes, Termination=SMD/SMT, Thickness=0.022inch, Voltage Rating (DC)=100V, Weight=2.3E-05oz, Width=0.5mm
C44 C48: library part CMP-2000-05991-2, "Multilayer Ceramic Capacitors 100pF ±5% 50V C0G SMD 0402", Case Code (Imperial)=0402, Case Code (Metric)=1005, Dielectric=C0G, Dielectric Material=Ceramic, Max Operating Temperature=125°C, Min Operating Temperature=-55°C, Package Quantity=1, Temperature Coefficient=30ppm/°C, Tolerance=5%, Voltage=50V, Case/Package=0402, Construction=Flat, Depth=0.5mm, Height=0.5mm, Lead Free="Lead Free", Length=1mm, Mount="Surface Mount", Number of Pins=2, Packaging="Tape and Reel", Radiation Hardening=No, REACH SVHC="No SVHC", RoHS Compliant=Yes, Series=C, Termination=SMD/SMT, Thickness=0.022inch, Voltage Rating=50V, Voltage Rating (DC)=50V, Weight=2.3E-05oz, Width=0.5mm
C51: "MLCC 47nF ±10% 50V X7R SMD 0402", Case Code (Imperial)=0402, Case Code (Metric)=1005, Dielectric=X7R, Dielectric Material=Ceramic, Max Operating Temperature=125°C, Min Operating Temperature=-55°C, Package Quantity=1, Tolerance=10%, Voltage=50V, Case/Package=0402, Construction=Flat, Depth=0.5mm, Dissipation Factor=5%, Height=0.5mm, Lead Free="Lead Free", Length=1mm, Mount="Surface Mount", Number of Pins=2, Packaging="Tape and Reel", Part Number=C1005X7R1H473K050BB, Radiation Hardening=No, REACH SVHC="No SVHC", Resistor Type=Ceramic, RoHS Compliant=Yes, Series=C, Termination=SMD/SMT, Thickness=0.022inch, Voltage Rating=50V, Voltage Rating (DC)=50V, Weight=2.3E-05oz, Width=0.02inch
C57: "Ceramic Capacitor for Automotive 33nF ±10% 25VDC X7R 0402 Paper T/R", Capacitance=33nF, Case Code (Imperial)=0402, Case Code (Metric)=1005, Dielectric=X7R, Max Operating Temperature=125°C, Min Operating Temperature=-55°C, Package Quantity=10000, Ratings=AEC-Q200, Tolerance=10%, Voltage Rating=25V, Case/Package=0402, Depth=0.5mm, Height=0.5mm, Lead Free="Lead Free", Length=1mm, Mount="Surface Mount", Packaging="Tape and Reel", Radiation Hardening=No, REACH SVHC="No SVHC", Termination=SMD/SMT, Thickness=0.022inch, Voltage Rating (DC)=25V, Width=0.02inch
C75 C82 C93: "47μF ±20% 10V X5R SMD 0805 Multilayer Ceramic Capacitors", Case Code (Imperial)=0805, Case Code (Metric)=2012, Dielectric=X5R, Dielectric Material=Ceramic, Max Operating Temperature=85°C, Min Operating Temperature=-55°C, Package Quantity=1, Tolerance=20%, Voltage=10V, Case/Package=0805, Depth=1.25mm, Height=1.25mm, Lead Free="Lead Free", Length=2mm, Mount="Surface Mount", Packaging="Tape and Reel", Part Number=C2012X5R1A476M125AC, REACH SVHC="No SVHC", Resistor Type=Ceramic, RoHS Compliant=Yes, Series=C, Termination=SMD/SMT, Thickness=0.057inch, Voltage Rating=10V, Voltage Rating (DC)=10V, Weight=0.000194oz, Width=0.049inch
C76 C77 C94 C99 C101 C148 C193: "4.7UF 10V X5R 0402", Case Code (Imperial)=0402, Case Code (Metric)=1005, Max Operating Temperature=85°C, Min Operating Temperature=-55°C, Tolerance=10%, Voltage Rating=10V, Case/Package=0402, Features="Soft Termination", Mount="Surface Mount", Packaging="Tape and Reel", Part Number=C1005X5R1A475K050BE, RoHS Compliant=Yes
C85: library part CMP-2000-05451-2, "Multilayer Ceramic Capacitors 47μF ±20% 10V X5R SMD 0805", Case Code (Imperial)=0805, Case Code (Metric)=2012, Dielectric=X5R, Dielectric Material=Ceramic, Max Operating Temperature=85°C, Min Operating Temperature=-55°C, Package Quantity=1, Tolerance=20%, Voltage=10V, Case/Package=0805, Depth=1.25mm, Height=1.25mm, Lead Free="Lead Free", Length=2mm, Mount="Surface Mount", Packaging="Tape and Reel", Part Number=C2012X5R1A476M125AC, REACH SVHC="No SVHC", Resistor Type=Ceramic, RoHS Compliant=Yes, Series=C, Termination=SMD/SMT, Thickness=0.057inch, Voltage Rating=10V, Voltage Rating (DC)=10V, Weight=0.000194oz, Width=0.049inch
C88: library part CMP-08246-007228-1, "CAP CER 4.7UF 10V X5R 0402", Case Code (Imperial)=0402, Case Code (Metric)=1005, Max Operating Temperature=85°C, Min Operating Temperature=-55°C, Tolerance=10%, Voltage Rating=10V, Case/Package=0402, Features="Soft Termination", Mount="Surface Mount", Packaging="Tape and Reel", Part Number=C1005X5R1A475K050BE, RoHS Compliant=Yes
C103 C125: "MLCC 47μF ±20% 10V X5R SMD 0805 Multilayer Ceramic Capacitors", Case Code (Imperial)=0805, Case Code (Metric)=2012, Dielectric=X5R, Dielectric Material=Ceramic, Max Operating Temperature=85°C, Min Operating Temperature=-55°C, Package Quantity=1, Tolerance=20%, Voltage=10V, Case/Package=0805, Depth=1.25mm, Height=1.25mm, Lead Free="Lead Free", Length=2mm, Mount="Surface Mount", Packaging="Tape and Reel", Part Number=C2012X5R1A476M125AC, REACH SVHC="No SVHC", Resistor Type=Ceramic, RoHS Compliant=Yes, Series=C, Termination=SMD/SMT, Thickness=0.057inch, Voltage Rating=10V, Voltage Rating (DC)=10V, Weight=0.000194oz, Width=0.049inch
C104 C105 C113 C119: "MLCC  4.7UF ±20 10V X5R 0402", Case Code (Imperial)=0402, Case Code (Metric)=1005, Max Operating Temperature=85°C, Min Operating Temperature=-55°C, Tolerance=10%, Voltage Rating=10V, Case/Package=0402, Features="Soft Termination", Mount="Surface Mount", Packaging="Tape and Reel", Part Number=C1005X5R1A475K050BE, RoHS Compliant=Yes
C163: "Multilayer Ceramic Chip Capacitor, 1 uF, +/- 10%, 10 V, -55 to 85 degC, 0402 (1005 Metric), RoHS, Tape and Reel", Manufacturer=TDK, Operating Temperature=-55°C~85°C, Package / Case=0402(1005Metric), Package Description="2-Pin Surface Mount Device, Body 1 x 0.5 mm", Package Reference=1005, PCN Part Number=MLCCPartNumberChange30/Nov/2012, Ratings=-, Standard Package=1, Temperature Coefficient=X5R, Tolerance=±10%, Voltage - Rated=10V, Applications=GeneralPurpose, Category=Capacitors, Datasheet URL=http://download.siliconexpert.com/pdfs/2015/4/21/15/54/45/779/tdk_/manual/37024850441143360mlcc_commercial_general_en.pdf, Datasheet Version=03/2015, Family=CeramicCapacitors, Features=-, Height - Seated (Max)=-, Lead Spacing=-, Lead Style=-, Manufacturer URL=http://www.tdk.com/, Mounting Technology=SurfaceMount, Mounting Type=SurfaceMount,MLCC, Online Catalog=CSeries,GeneralPurpose, Other Names=445-4114-6, Packaging=Digi-Reel®, Part Number=C1005X5R1A105K050BB, Product Training Modules=CSeriesGeneralApplicationsSEAT,CCV,andTVCLDesignToolsGuidetoReplacinganElectrolyticCapacitorwithanMLCC, RoHS Information=RoHSCertificate-MLCC, Series=C, Size / Dimension="0.039\"Lx0.020\"W(1.00mmx0.50mm)", Thickness (Max)="0.022\"(0.55mm)"
C164 C173 C175: "CAP CER 4.7UF 10V X5R 0402", Case Code (Imperial)=0402, Case Code (Metric)=1005, Max Operating Temperature=85°C, Min Operating Temperature=-55°C, Tolerance=10%, Voltage Rating=10V, Case/Package=0402, Features="Soft Termination", Mount="Surface Mount", Packaging="Tape and Reel", Part Number=C1005X5R1A475K050BE, RoHS Compliant=Yes
C177 C178: "Multilayer Ceramic Capacitors 10nF ±10% 100V X7S SMD 0402", Case Code (Imperial)=0402, Case Code (Metric)=1005, Dielectric=X7S, Dielectric Material=Ceramic, Max Operating Temperature=125°C, Min Operating Temperature=-55°C, Package Quantity=1, Tolerance=10%, Voltage=100V, Case/Package=0402, Depth=0.5mm, Dissipation Factor=5%, Height=0.5mm, Lead Free="Lead Free", Length=1mm, Mount="Surface Mount", Number of Pins=2, Packaging="Tape and Reel", Part Number=C1005X7S2A103K050BB, REACH SVHC="No SVHC", Resistor Type=Ceramic, RoHS Compliant=Yes, Series=C, Termination=SMD/SMT, Thickness=0.022inch, Voltage Rating=100V, Voltage Rating (DC)=100V, Weight=2.3E-05oz, Width=0.02inch
C181 C182 C183 C184 C185 C186 C187 C188 C189 C190 C191 C192: "Multilayer Ceramic Capacitors 47nF ±10% 50V X7R SMD 0402", Case Code (Imperial)=0402, Case Code (Metric)=1005, Dielectric=X7R, Dielectric Material=Ceramic, Max Operating Temperature=125°C, Min Operating Temperature=-55°C, Package Quantity=1, Tolerance=10%, Voltage=50V, Case/Package=0402, Construction=Flat, Depth=0.5mm, Dissipation Factor=5%, Height=0.5mm, Lead Free="Lead Free", Length=1mm, Mount="Surface Mount", Number of Pins=2, Packaging="Tape and Reel", Part Number=C1005X7R1H473K050BB, Radiation Hardening=No, REACH SVHC="No SVHC", Resistor Type=Ceramic, RoHS Compliant=Yes, Series=C, Termination=SMD/SMT, Thickness=0.022inch, Voltage Rating=50V, Voltage Rating (DC)=50V, Weight=2.3E-05oz, Width=0.02inch
D1: "DIODE SCHOTTKY 20V 0.5A SOD962", Ambient Temperature Range High=+150°C, Ambient Temperature Range Low=-55°C, Capacitance=25pF, Forward Current=0.71A, Manufacturer=Nexperia, Max Surge Forward Current=4.5A, Package=SOD962, Peak Reverse Current=10uA, Reverse Voltage=20V, Temperature="to +150°C", Automotive=No, Category=Diode, ComponentLink2Description=Datasheet, ComponentLink2URL=https://assets.nexperia.com/documents/data-sheet/PMEG2005AESF.pdf, Device Class L1="Discrete Semiconductors", Device Class L2=Diodes, Device Class L3="Schottky Diodes", Digikey Description="DIODE SCHOTTKY 20V 0.5A SOD962", Footprint Url=https://assets.nexperia.com/documents/outline-drawing/SOD962-2.pdf, Height=0.32mm, Lead Free=Yes, Manufacturer Part Number=PMEG2005AESFYL, Max Junction Temp=+150°C, Octopart=https://octopart.com/pmeg2005aesfyl-nexperia-78741393, RoHS=TRUE, Temperature Range High=+150°C
FB1 FB2: "CHIP BEADS FOR GENERAL SIGNAL LI", Case Code (Imperial)=0201, Case Code (Metric)=0603, DC Resistance (DCR)=130mR, Max Current Rating=1A, Max Operating Temperature=125°C, Min Operating Temperature=-55°C, Case/Package=0201, Mount="Surface Mount", Number of Lines=1, Packaging="Cut Tape", RoHS Compliant=Yes
Fid1 Fid2 Fid3 Fid4: library part Fid-Mark, "Fiducial Mark", Manufacturer=N.A., Artikkelnr Noca=N.A., Component Class=Connectors, ComponentLink1Description=Datasheet, ComponentLink1URL=N.A., ComponentLink2Description="Supplier link", ComponentLink2URL=N.A., Footprint Doc=Fiducial, HelpURL=N.A., LatestRevisionDate=2009-12-12, Manufacturer Part Number=N.A., Note=N.A., Pad Count=1, Part Number=Fid-Mark, Part number IPS=N.A., PartId=100500073, Published=2009-12-12, Supplier 1=N.A., Supplier 2=N.A., Supplier Part Number 1=N.A., Supplier Part Number 2=N.A.
J1 J2: "BNC Connector Jack, Female Socket 75Ohm Board Edge, End Launch; Panel Mount Solder", Package=None, Supplier Part Number 1=SAM10916-ND, Availability=Unavailable, DigiKey-Purchase-URL=https://snapeda.com/shop?store=DigiKey&id=3266999, MF="Samtec Inc.", MP=BNC7T-J-P-GN-ST-EM1D, Price=None, SnapEDA_Link=https://www.snapeda.com/parts/BNC7T-J-P-GN-ST-EM1D/Samtec%20Inc./view-part/3266999/?ref=snap, Supplier 1=DigiKey, Toby_UK-Purchase-URL=https://snapeda.com/shop?store=Toby+UK&id=3266999
J3: library part CMP-04776-000811-1, "CONN HEADER SMD 10POS 2MM", Color=Black, Current Rating=2A, Max Operating Temperature=105°C, Min Operating Temperature=-55°C, Voltage Rating=125V, Connector Type="Male Pin", Contact Material=Bronze, Contact Mating Length=0.141inch, Contact Plating=Gold, Contact Type="Male Pin", Depth=6.35mm, Gender=Male, Housing Color=Black, Housing Material=Nylon, Length=12.65mm, Mount="Surface Mount", Number of Contacts=10, Number of Positions=10, Number of Rows=2, Orientation=Straight, Packaging=Rail/Tube, Pitch=2mm, RoHS Compliant=Yes, Row Spacing=0.079inch, Series="Milli-Grid™ 87832", Termination=Solder
J4: "CONN HEADER SMD R/A 2POS 1.5MM", Current Rating=3.5A, Manufacturer=Molex, Package=0, Temperature="-40°C to +105°C", Temperature Range High=+105°C, Temperature Range Low=-40°C, Voltage Rating=150V, Automotive=No, Category=Conn, ComponentLink2Description=Datasheet, ComponentLink2URL=https://www.molex.com/webdocs/datasheets/pdf/en-us/5040500291_PCB_HEADERS.pdf, Conn Gender=Male, Conn Orientation="Right Angle", Contact Material=Gold,Nickel, Device Class L1=Connectors, Device Class L2="Headers and Wire Housings", Device Class L3=unset, Digikey Description="CONN HEADER SMD R/A 2POS 1.5MM", Footprint Url=https://www.molex.com/pdm_docs/sd/5040500291_sd.pdf, Height=2.15mm, Lead Free=Yes, Manufacturer Part Number=5040500291, Number of Contacts=2, Number of Rows=1, Octopart=https://octopart.com/504050-0291-molex-99548498, Pitch=1.5mm, RoHS=TRUE
J6: "Male Header, Pitch 1.25 mm, 1 x 3 Position, Height 4.7 mm, -40 to 85 degC, RoHS, Tape and Reel", Current Rating=1A, Manufacturer=Molex, Package Description="Male Header, Pitch 1.25 mm, 1 x 3 Position, Height 4.7 mm", Voltage Rating=125V, Brand=Molex, Contact Material=PhosphorBronze, Contact Plating=Tin, Datasheet URL=http://www.molex.com/pdm_docs/sd/533980371_sd.pdf, Datasheet Version="Rev. J, 09/2015", Factory Pack Quantity=1000, Housing Material=Nylon, Manufacturer URL=http://www.molex.com/, Mounting Angle=Vertical, Mounting Style=SMD/SMT, Mounting Technology=SurfaceMount, Number of Positions=3, Number of Positions / Contacts=3, Number of Rows=1, Package Reference=53398-0371, Packaging=Reel, Pitch=1.25mm, Product Category=Headers&WireHousings, Product Type=Headers, RoHS=Details, Series=53398, Termination Style=SMD, Tradename=PicoBlade, Type=Shrouded
L1: "Film type RF Inductor 3.9nH ±0.1nH 400mA 0.3Ω 0201 (0603)", Case Code (Imperial)=0201, Case Code (Metric)=0603, Current=250mA, Current Rating=400mA, DC Resistance (DCR)=300mR, Inductance=3.9nH, Max Operating Temperature=125°C, Min Operating Temperature=-55°C, Package Quantity=15000, Resistor Type="Thin Film", Self Resonant Frequency=5.7GHz, Test Frequency=500MHz, Tolerance=3%, Case/Package=0201, Core Material=Non-Magnetic, DC Current=400mA, Depth=0.33mm, Height=0.3mm, Height - Seated (Max)=0.013inch, Lead Free="Lead Free", Length=0.6mm, Max DC Current=400mA, Military Standard=Not, Mount="Surface Mount", Packaging="Tape and Reel", Q Factor=14, Radiation Hardening=No, Rated Current-Max=400mA, REACH SVHC="No SVHC", Series=LQP, Shielding=Unshielded, Technology="THIN FILM", Termination=SMD/SMT, Width=0.012inch
L2: "Film type RF Inductor 6.8nH ±5% 300mA 0.6Ω 0201 (0603)", Case Code (Imperial)=0201, Case Code (Metric)=0603, Current Rating=300mA, DC Resistance (DCR)=600mR, Max Operating Temperature=125°C, Min Operating Temperature=-55°C, Package Quantity=15000, Resistor Type="Thin Film", Self Resonant Frequency=3.9GHz, Test Frequency=500MHz, Tolerance=5%, Case/Package=0201, Core Material=Non-Magnetic, DC Current=300mA, Depth=0.33mm, Height=0.3mm, Height - Seated (Max)=0.013inch, Length=0.024inch, Max DC Current=300mA, Military Standard=Not, Mount="Surface Mount", Packaging="Tape and Reel", Q Factor=14, Radiation Hardening=No, Shielding=Unshielded, Termination=SMD/SMT, Weight=6E-06oz, Width=0.012inch
L3 L4: "Shielded Wirewound Inductor 4.7uH 20% 1400mA 0.2Ω 1008 (2520)", Case Code (Imperial)=1008, Case Code (Metric)=2520, Current Rating=2A, DC Resistance (DCR)=200mR, Inductance=4.7uH, Max DC Current=1.4A, Max Operating Temperature=125°C, Min Operating Temperature=-40°C, Resistor Type=Wirewound, Test Frequency=1MHz, Tolerance=20%, Case/Package=1008, Core Material=Ferrite, Depth=2mm, Height - Seated (Max)=0.047inch, Length=0.098inch, Mount="Surface Mount", Packaging="Tape and Reel", Shielding=Shielded, Width=0.079inch
LED1 LED2 LED3: "LED", Manufacturer=Lite-On, Mouser Part Number=859-LTST-C191KFKT, Arrow Part Number=LTST-C191KFKT, Arrow Price/Stock=https://www.arrow.com/en/products/ltst-c191kfkt/lite-on-technology.html?utm_currency=USD&region=nac, Datasheet Link=https://datasheet.datasheetarchive.com/originals/distributors/Datasheets-305/79307.pdf, Height=0.55mm, Mouser Price/Stock=https://www.mouser.co.uk/ProductDetail/Lite-On/LTST-C191KFKT?qs=1bx9pL%2Fk%252BiAv01YAc0eitQ%3D%3D, Part Number=LTST-C191KFKT
M1: "SFP+, Connector, .8mm [.031in] Centerline, Power & Signal, Operating Temperature Range -55 – 85 °C [-67 – 185 °F], Data Rate (Max) 16Gb/sec", Manufacturer="TE Connectivity (TE", Author="Parsa Malekpor", License=Apache-2.0, Part Number=1888247-1
Q1: "Transistor", Manufacturer_Name=STMicroelectronics, Mouser Part Number=511-STM6710LWB6F, Arrow Part Number=STM6710LWB6F, Arrow Price/Stock=https://www.arrow.com/en/products/stm6710lwb6f/stmicroelectronics, Datasheet Link=https://www.st.com/resource/en/datasheet/stm6710.pdf, Height=1.45mm, Manufacturer_Part_Number=STM6710LWB6F, Mouser Price/Stock=https://www.mouser.co.uk/ProductDetail/STMicroelectronics/STM6710LWB6F?qs=asv7t3zdqdgT54rODYaRqg%3D%3D
Q2 Q3 Q4: "MOSFET N-CH 50V 0.2A UMT3F", Continuous Drain Current=200mA, Drain to Source Breakdown Voltage=50V, Drain to Source Resistance=1.6Ω, Gate To Source Voltage=8V, Input Capacitace At Vds="26pF @ 10V", Manufacturer=Rohm, Max Forward Diode Voltage=1.2V, Max Junction Temp=+150°C, Package=UMT3F, Power Dissipation=150mW, Pulse Drain Current=800mA, Temperature="to +150°C", Automotive=No, Category=Trans, ComponentLink2Description=Datasheet, ComponentLink2URL=https://d1d2qsbl8m0m72.cloudfront.net/en/products/databook/datasheet/discrete/transistor/mosfet/ru1j002yn-e.pdf, Depletion Mode=False, Device Class L1="Discrete Semiconductors", Device Class L2=Transistors, Device Class L3=MOSFETs, Digikey Description="MOSFET N-CH 50V 0.2A UMT3F", Drain To Source Voltage=50V, Height=1.05mm, Lead Free=Yes, Manufacturer Part Number=RU1J002YNTCL, Mouser Description="MOSFET 0.9V Drive Nch MOSFET", Number Of Channels=1, Number Of N Channels=1, Octopart=https://octopart.com/ru1j002yntcl-rohm-47197697, RoHS=TRUE, Rthja Max=833°C/W, Standoff Height=0mm, Temperature Range High=+150°C, Threshold Vgs Max=0.8V, Threshold Vgs Min=0.3V, Turn Off Delay Time=17ns, Turn On Delay Time=5ns
R1 R2 R3 R4 R5 R6 R7 R8 R9 R10 R11 R12 R15 R16 R18 R19 R25 R26 R27 R28 R29 R34 R35 R36 R37 R38 R56 R57 R58 R59 R64 R65 R66 R67 R68 R69 R72 R74 R75 R78 R80 R81 R82 R83 R84 R85 R86 R87 R97 R98 R99 R100 R101 R102 R103: Manufacturer="Yageo / Phycomp"
  R1 R5 R74: Part Number=RC0402FR-07200KL
  R2 R8 R34 R68 R69: Part Number=RC0402FR-07100KL
  R3: Part Number=RC0402FR-07160KL
  R4: Part Number=RC0402FR-0724KL
  R6: Part Number=RC0402FR-0720KL
  R7: Part Number=RC0402FR-0730KL
  R9: Part Number=RC0402FR-072K2L
  R10 R11 R36: Part Number=RC0402FR-074K99L
  R12 R78 R80: Part Number=RC0402FR-071K3L
  R15 R16 R18 R37: Part Number=RC0402FR-074K87L
  R19 R25: Part Number=RC0402FR-0739RL
  R26 R27 R28 R29: Part Number=RC0402FR-074R99L
  R35: Part Number=RC0402FR-071ML
  R38 R59 R81 R97 R98 R99 R100 R101 R102 R103: Part Number=RC0402FR-07100RL
  R56 R57 R64 R65 R66 R67: Part Number=RC0402FR-0775RL
  R58: Part Number=RC0402FR-0737R4L
  R72: Part Number=RC0402FR-078K06L
  R75: Part Number=RC0402FR-0763K4L
  R82 R83 R84 R85 R86 R87: Part Number=RC0402FR-0710KL
R13 R14 R21 R32 R53 R77 R79: "240R 0.063W 1% 0402 (1005 Metric)  SMD", Case-EIA=0402, Case-Metric=1005, Power="0.063 W", Tolerance="1 %", Part Number=RC0402FR-07240RL, Technology=SMT
R17 R20: Manufacturer=Yageo
  R17: Part Number=RC0402FR-073K57L
  R20: Part Number=RC0402FR-0780R6L